# Altium PCB STM32F103RCT6最小系统.PcbDoc
Units mil, origin at the board's own origin, x right, y up, seen from the top; angles counter-clockwise.
Board outline 6000 x 4000 mil, 2 copper layers (Top Layer, Bottom Layer); 52 components, 58 nets, 352 pads, 13 vias.
Unrouted connection lines stored in the file: 58.
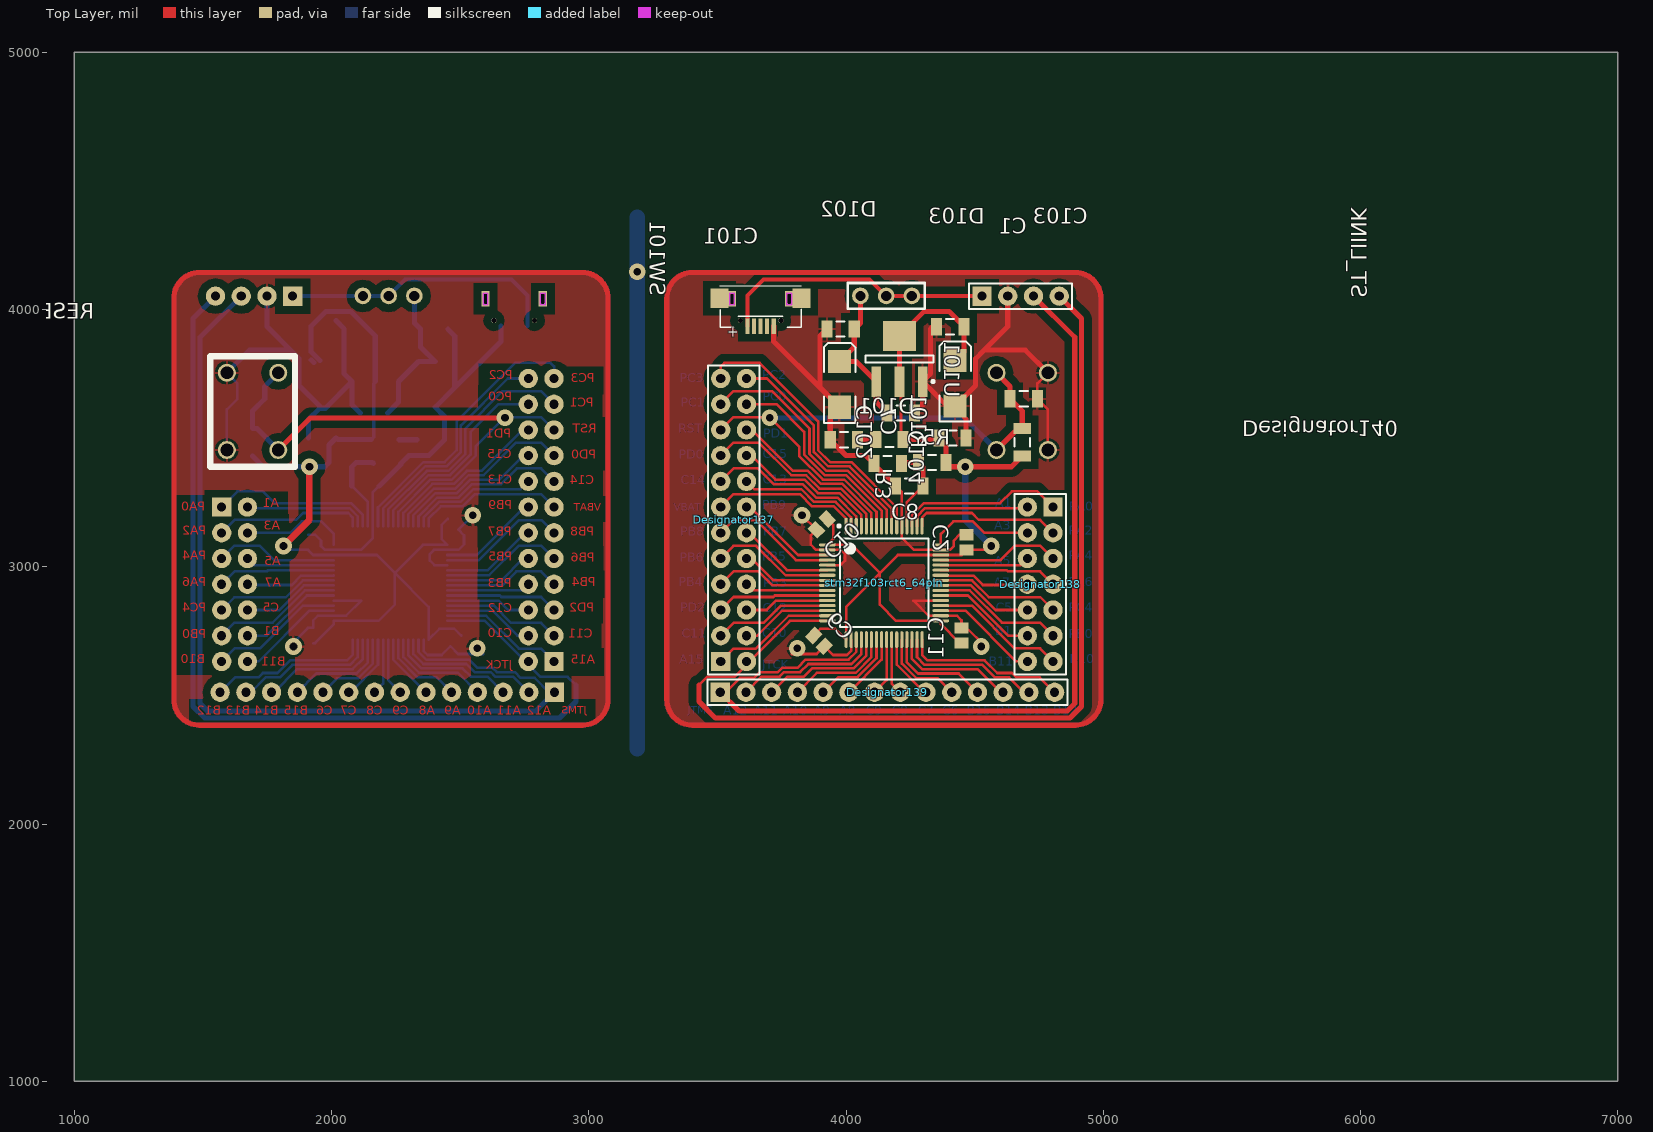
[diagram p0: Top Layer view]
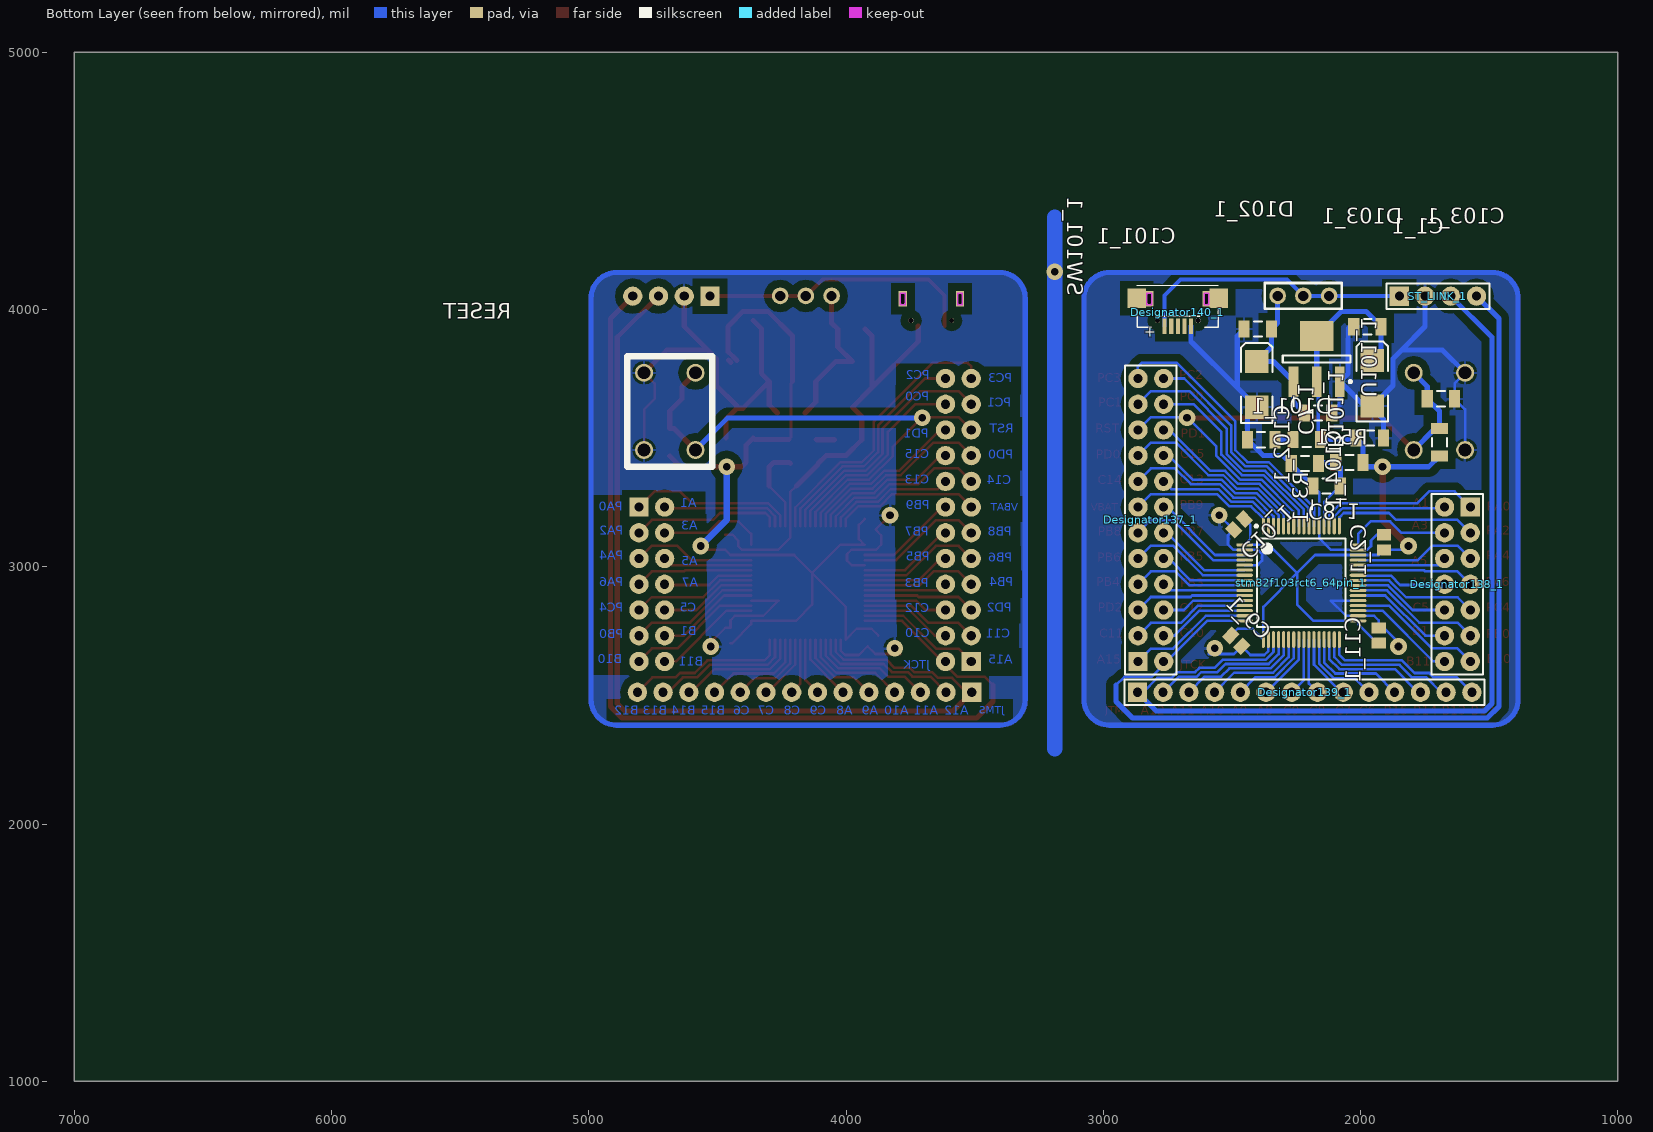
[diagram p1: Bottom Layer view, seen from below]

## Layer stack, top to bottom
Top Solder: solder mask 0.4, Solder Resist, Dk 3.5
Top Layer: signal copper 1.4
Dielectric 1: dielectric 12.6, FR-4, Dk 4.8
Bottom Layer: signal copper 1.4
Bottom Solder: solder mask 0.4, Solder Resist, Dk 3.5

## Board outline
1000,1000 7000,1000 7000,5000 1000,5000

## Design rules (kind name [scope] priority, off if disabled: settings)
Clearance Clearance_ploygon [InPolygon] p1: gap=30 ignorepadtopadclearanceinfootprint=FALSE except(0: Arc-Hole Track-Hole SMDPad-Hole THPad-Hole Via-Hole Fill-Hole Poly-Hole Region-Hole Text-Hole)
Clearance [All] p2: gap=7 ignorepadtopadclearanceinfootprint=FALSE except(0: Arc-Hole Track-Hole SMDPad-Hole THPad-Hole Via-Hole Fill-Hole Poly-Hole Region-Hole Text-Hole)
PolygonConnect [All] p1: connectstyle=Relief reliefconductorwidth=10 reliefentries=4 polygonreliefangle="90 Angle" airgapwidth=10
RoutingVias [All] p1: holewidth=28 width=50 viastyle="Through Hole" minholewidth=28 minwidth=50 maxholewidth=28 maxwidth=50
SolderMaskExpansion [All] p1: expansion=4
Width [All] p1: maxlimit=100 minlimit=10 preferedwidth=10
30 further rules are at their usual default settings.

## Components (designator, comment, footprint, x,y, rotation, side; value= is the part's Value field where it differs from the comment)
C1 "Cap Semi" C1206 4691,3653 r180 top
C1_1 "Cap Semi" C1206 1687,3653 r0 bottom (schematic designator C1)
C2 "Cap Semi" C0805 4469,3095 r270 top
C2_1 "Cap Semi" C0805 1909,3095 r270 bottom (schematic designator C2)
C7 "Cap Semi" C1206 4162,3401 r180 top
C7_1 "Cap Semi" C1206 2216,3401 r0 bottom (schematic designator C7)
C8 "Cap Semi" C1206 4246,3314 r0 top
C8_1 "Cap Semi" C1206 2132,3314 r180 bottom (schematic designator C8)
C9 "Cap Semi" C0805 3895.12,2711.88 r135 top
C9_1 "Cap Semi" C0805 2482.88,2711.88 r45 bottom (schematic designator C9)
C10 "Cap Semi" C0805 3905.88,3164.88 r45 top
C10_1 "Cap Semi" C0805 2472.12,3164.88 r135 bottom (schematic designator C10)
C11 "Cap Semi" C0805 4449,2733 r270 top
C11_1 "Cap Semi" C0805 1929,2733 r270 bottom (schematic designator C11)
C101 "电解电容" C1206 3979,3924 r180 top
C101_1 "电解电容" C1206 2399,3924 r0 bottom (schematic designator C101)
C102 "Cap Semi" C1206 4213,3598 r180 top
C102_1 "Cap Semi" C1206 2165,3598 r0 bottom (schematic designator C102)
C103 "电解电容" C1206 4405,3933 r180 top
C103_1 "电解电容" C1206 1973,3933 r0 bottom (schematic designator C103)
C104 "Cap Semi" C1206 4414,3501 r180 top
C104_1 "Cap Semi" C1206 1964,3501 r0 bottom (schematic designator C104)
D101 "LED" C1206 4169,3495 r180 top
D101_1 "LED" C1206 2209,3495 r0 bottom (schematic designator D101)
D102 "SMBJ5.0A" SMB 3975,3709 r90 top
D102_1 "SMBJ5.0A" SMB 2403,3709 r90 bottom (schematic designator D102)
D103 "SMBJ3.3A" SMB 4424,3713.42 r90 top
D103_1 "SMBJ3.3A" SMB 1954,3713.42 r90 bottom (schematic designator D103)
Designator137 "Comment" HDR2X12 3513,2632 r90 top
Designator137_1 "Comment" HDR2X12 2865,2632 r90 bottom
Designator138 "Comment" HDR2X7 4805,3232 r270 top
Designator138_1 "Comment" HDR2X7 1573,3232 r270 bottom
Designator139 "Comment" HDR1X14 3511,2512 r0 top
Designator139_1 "Comment" HDR1X14 2867,2512 r180 bottom
Designator140 "Comment" miCRo_USB 3668,4022 r0 top
Designator140_1 "Comment" miCRo_USB 2710,4022 r180 bottom
R3 "Res3" C1206 4685,3484 r270 top
R3_1 "Res3" C1206 1693,3484 r270 bottom (schematic designator R3)
R5 "Res3" C1206 4335,3405 r180 top
R5_1 "Res3" C1206 2043,3405 r0 bottom (schematic designator R5)
R101 "Res2" C1206 3992,3494 r0 top
R101_1 "Res2" C1206 2386,3494 r180 bottom (schematic designator R101)
RESET "KRY_M" SW_4c 4785,3454 r90 bottom
RESET_1 "KRY_M" SW_4c 1593,3454 r90 top (schematic designator RESET)
ST_LIINK "Header 4" HDR1X4 4529,4052 r0 top
ST_LIINK_1 "Header 4" HDR1X4 1849,4052 r180 bottom (schematic designator ST_LIINK)
stm32f103rct6_64pin "stm32f103rct6_64pin" stm32f103rct6_64pin 4148.1,2937.47 r270 top
stm32f103rct6_64pin_1 "stm32f103rct6_64pin" stm32f103rct6_64pin 2229.9,2937.47 r270 bottom (schematic designator stm32f103rct6_64pin)
SW101 "三脚开关" 三脚开关 4056,4053 r0 top
SW101_1 "三脚开关" 三脚开关 2322,4053 r180 bottom (schematic designator SW101)
U101 "AMS1117_3.3v" AMS1117_3.3V 4208.16,3804.83 r90 top
U101_1 "AMS1117_3.3v" AMS1117_3.3V 2169.84,3804.83 r90 bottom (schematic designator U101)

## Footprints (in the part's own frame and the unit in brackets; to place one, negate y for a bottom-side part, rotate by r counter-clockwise, add the part's x,y. Pads: shape width x height; smd on the part's side, far side on the other; paste and mask are expansions set on the pad)
AMS1117_3.3V [mm] "稳压"
  rect 3x0.95 smd: 1(-2.159,-2.286) 2(-2.159,0.004) 3(-2.159,2.294)
  rect 3x3.3 smd: 4(2.341,0.004)
  silkscreen extent -2.28,-3.44 0.44,3.36, body extent -1.76,-3.35 1.95,3.36, height 1.8
C0805 [mm] "Chip Capacitor, Body 2.0x1.3mm, IPC High Density"
  rect 1.1x1.4 smd: 1(-0.75,0) 2(0.75,0)
  body extent -1.1,-0.72 1.1,0.72, height 1.4
C1206 [mm] "Chip Capacitor, Body 3.2x1.6mm, IPC High Density"
  rect 1.1x1.7 smd: 1(-1.35,0) 2(1.35,0)
  silkscreen extent -0.4,-0.75 0.4,0.75, body extent -1.7,-0.9 1.7,0.9, height 1.3
HDR1X4 [mm] "Connector; Header; 4 Position"
  rect 1.905x1.905 hole 0.9: 1(0,0)
  round 1.905 hole 0.9: 2(2.54,0) 3(5.08,0) 4(7.62,0)
  silkscreen extent -1.27,-1.27 8.89,1.27
HDR1X14 [mm] "Connector; Header; 14 Position"
  rect 1.905x1.905 hole 0.9: 1(0,0)
  round 1.905 hole 0.9: 2(2.54,0) 3(5.08,0) 4(7.62,0) 5(10.16,0) 6(12.7,0) 7(15.24,0) 8(17.78,0) 9(20.32,0) 10(22.86,0) 11(25.4,0) 12(27.94,0) 13(30.48,0) 14(33.02,0)
  silkscreen extent -1.27,-1.27 34.29,1.27
HDR2X7 [mm] "Connector; Header; 7x2 Position"
  rect 1.905x1.905 hole 0.9: 1(0,0)
  round 1.905 hole 0.9: 2(0,-2.54) 3(2.54,0) 4(2.54,-2.54) 5(5.08,0) 6(5.08,-2.54) 7(7.62,0) 8(7.62,-2.54) 9(10.16,0) 10(10.16,-2.54) 11(12.7,0) 12(12.7,-2.54) 13(15.24,0) 14(15.24,-2.54)
  silkscreen extent -1.27,-3.81 16.51,1.27
HDR2X12 [mm] "Connector; Header; 12x2 Position"
  rect 1.905x1.905 hole 0.9: 1(0,0)
  round 1.905 hole 0.9: 2(0,-2.54) 3(2.54,0) 4(2.54,-2.54) 5(5.08,0) 6(5.08,-2.54) 7(7.62,0) 8(7.62,-2.54) 9(10.16,0) 10(10.16,-2.54) 11(12.7,0) 12(12.7,-2.54) 13(15.24,0) 14(15.24,-2.54) 15(17.78,0) 16(17.78,-2.54) 17(20.32,0) 18(20.32,-2.54) 19(22.86,0) 20(22.86,-2.54) 21(25.4,0) 22(25.4,-2.54) 23(27.94,0) 24(27.94,-2.54)
  silkscreen extent -1.27,-3.81 29.21,1.27
miCRo_USB [mm]
  rect 0.4x1.55 smd: 1(-1.3,-2.2) 2(-0.65,-2.2) 3(0,-2.2) 4(0.65,-2.2) 5(1.3,-2.2)
  rect 1.8x1.9 smd: 6(-4.05,0.55) 6(4.05,0.55)
  rect 0.8x1.5 hole 0.4 slot 1 at 90 deg: 6(-2.825,0.5) 6(2.825,0.5)
  round 0.5 hole 0.5 unplated: ""(-2,-1.65) ""(2,-1.65)
  Keep-Out Layer lines w0.127: -3.054,-0.075 -2.596,-0.075 -2.596,1.043 -3.054,1.043 -3.054,-0.075 ; 2.596,-0.075 3.054,-0.075 3.054,1.043 2.596,1.043 2.596,-0.075
  silkscreen extent -4.05,-2.3 4,1.8
SMB [mm] "DO-214-AA/SMB; 2 C-Bend Leads; Body 5.3 x 3.6 mm, inc. leads (LxW)"
  rect 2.3x2.3 smd: 1(-2.25,0) 2(2.25,0)
  silkscreen extent -3.8,-1.55 4.1,1.55
stm32f103rct6_64pin [mm]
  oval 1.65x0.3 smd: 1(-5.6,-3.75) 2(-5.6,-3.25) 3(-5.6,-2.75) 4(-5.6,-2.25) 5(-5.6,-1.75) 6(-5.6,-1.25) 7(-5.6,-0.75) 8(-5.6,-0.25) 9(-5.6,0.25) 10(-5.6,0.75) 11(-5.6,1.25) 12(-5.6,1.75) 13(-5.6,2.25) 14(-5.6,2.75) 15(-5.6,3.25) 16(-5.6,3.75) 33(5.6,3.75) 34(5.6,3.25) 35(5.6,2.75) 36(5.6,2.25) 37(5.6,1.75) 38(5.6,1.25) 39(5.6,0.75) 40(5.6,0.25) 41(5.6,-0.25) 42(5.6,-0.75) 43(5.6,-1.25) 44(5.6,-1.75) 45(5.6,-2.25) 46(5.6,-2.75) 47(5.6,-3.25) 48(5.6,-3.75)
  oval 0.3x1.65 smd: 17(-3.75,5.6) 18(-3.25,5.6) 19(-2.75,5.6) 20(-2.25,5.6) 21(-1.75,5.6) 22(-1.25,5.6) 23(-0.75,5.6) 24(-0.25,5.6) 25(0.25,5.6) 26(0.75,5.6) 27(1.25,5.6) 28(1.75,5.6) 29(2.25,5.6) 30(2.75,5.6) 31(3.25,5.6) 32(3.75,5.6) 49(3.75,-5.6) 50(3.25,-5.6) 51(2.75,-5.6) 52(2.25,-5.6) 53(1.75,-5.6) 54(1.25,-5.6) 55(0.75,-5.6) 56(0.25,-5.6) 57(-0.25,-5.6) 58(-0.75,-5.6) 59(-1.25,-5.6) 60(-1.75,-5.6) 61(-2.25,-5.6) 62(-2.75,-5.6) 63(-3.25,-5.6) 64(-3.75,-5.6)
  silkscreen extent -5.72,-4.57 4.38,4.38, body extent -5,-5 5,5, height 1.6
SW_4c [mil]
  round 70 hole 50: 1(0,0) 1(300,0) 2(0,-200) 2(300,-200)
  silkscreen extent -65,-265 365,65
三脚开关 [mil]
  round 65 hole 40: 1(0,0) 2(200,0) 3(100,0)
  silkscreen extent -50,-50 250,50

## Part data
C1 C1_1 C2 C2_1 C7 C7_1 C8 C8_1 C9 C9_1 C10 C10_1 C11 C11_1 C102 C102_1 C104 C104_1: "Capacitor (Semiconductor SIM Model)"
D101 D101_1: library part LED_, "发光二极管"
D102 D102_1 D103 D103_1: library part "D Schottky", "Schottky Diode"
R3 R3_1 R5 R5_1 R101 R101_1: "Resistor"
RESET RESET_1: library part SW_4t
ST_LIINK ST_LIINK_1: "Header, 4-Pin"

## Via types
v1: diameter 65, hole 30, Top Layer to Bottom Layer, 13 vias

## Nets (pads, with @x,y where several pads share a name; then routed paths per layer and width w, separated by ;. In a path a pad name is that pad's centre, name@x,y a point inside that pad or via, vN(x,y) a via of type N, cw(c..) or ccw(c..) an arc to the next point about the centre after c; other vN are vias at no path point)
GND: C1.1 C1_1.1 C2.1 C2_1.1 C7.2 C7_1.2 C8.1 C8_1.1 C9.1 C9_1.1 C10.1 C10_1.1 C11.1 C11_1.1 C101.2 C101_1.2 C102.1 C102_1.1 C103.2 C103_1.2 C104.1 C104_1.1 D102.1 D102_1.1 D103.1 D103_1.1 Designator140.5 Designator140_1.5 R101.1 R101_1.1 RESET.1 RESET_1.1 ST_LIINK.2 ST_LIINK_1.2 stm32f103rct6_64pin.12 stm32f103rct6_64pin.18 stm32f103rct6_64pin.28 stm32f103rct6_64pin.31 stm32f103rct6_64pin.47 stm32f103rct6_64pin.60 stm32f103rct6_64pin.63 stm32f103rct6_64pin_1.12 stm32f103rct6_64pin_1.18 stm32f103rct6_64pin_1.28 stm32f103rct6_64pin_1.31 stm32f103rct6_64pin_1.47 stm32f103rct6_64pin_1.60 stm32f103rct6_64pin_1.63 U101.1 U101_1.1 | length 36276.8
  Top Layer w10: v1@3789,2661 3886,2661 C9.1 3950,2657 4003.96,2657 4020.15,2673.19 stm32f103rct6_64pin.47 ; v1@3801,3200 v1(3829,3200) C10.1 3863,3122 3863,3086.43 3884,3065.43 stm32f103rct6_64pin.63 3979.57,3065.43 3996,3049 3996,3024 3978.37,3006.37 stm32f103rct6_64pin.60 ; C8.1 4217,3289.85 stm32f103rct6_64pin.12 4217,3112 4263.57,3065.43 stm32f103rct6_64pin.18 4403.87,3065.43 4419,3080.56 4419,3101.78 4441.75,3124.53 C2.1 ; stm32f103rct6_64pin.28 4261.85,2868.57 4320.91,2809.52 stm32f103rct6_64pin.31 4431.48,2809.52 4449,2792 C11.1 4469.47,2762.53 v1@4538,2694 ; RESET.1@4785,3454 4785,3612.15 C1.1 4744.15,3713.15 RESET.1@4785,3754
  Top Layer w20: 1992,2384 2975,2384 ccw(c2975,2484) 3075,2484 3075,4044 ccw(c2975,4044) 2975,4144 1487,4144 ccw(c1487,4044) 1387,4044 1387,2484 ccw(c1487,2484) 1487,2384 1994,2384 ; Designator140.5 3719.18,3876.24 3899,3696.42 ; 3908,2384 4891,2384 ccw(c4891,2484) 4991,2484 4991,4044 ccw(c4891,4044) 4891,4144 3403,4144 ccw(c3403,4044) 3303,4044 3303,2484 ccw(c3403,2484) 3403,2384 3910,2384 ; C101.2 3899,3897.15 3899,3696.42 ; C8.1 4108.85,3398 C7.2 4076.85,3433 3999.85,3433 R101.1 3938.85,3584.27 D102.1 3899,3696.42 ; C102.1 4298.16,3630.01 U101.1 ; C103.2@4360.93,3956.93 4329,3925 4329,3750.68 U101.1 ; D103.1 4504,3704.83 4504,3809 4537,3842 ; C104.1 4467.15,3573.27 4424,3616.42 4401.57,3616.42 U101.1 ; ST_LIINK.2 4629,3934 4537,3842 ; RESET.1@4785,3754 4697,3842 4537,3842
  Bottom Layer w10: RESET_1.1@1593,3454 1593,3612.15 C1_1.1 1633.85,3713.15 RESET_1.1@1593,3754 ; v1@1840,2694 1908.53,2762.53 C11_1.1 1929,2792 1946.52,2809.52 stm32f103rct6_64pin_1.31 2057.09,2809.52 2116.15,2868.57 stm32f103rct6_64pin_1.28 ; C2_1.1 1936.25,3124.53 1959,3101.78 1959,3080.56 1974.13,3065.43 stm32f103rct6_64pin_1.18 2114.43,3065.43 2161,3112 stm32f103rct6_64pin_1.12 2161,3289.85 C8_1.1 ; stm32f103rct6_64pin_1.47 2357.85,2673.19 2374.04,2657 2428,2657 C9_1.1 2492,2661 v1@2589,2661 ; stm32f103rct6_64pin_1.60 2399.63,3006.37 2382,3024 2382,3049 2398.43,3065.43 stm32f103rct6_64pin_1.63 2494,3065.43 2515,3086.43 2515,3122 C10_1.1 v1(2549,3200) v1@2577,3200
  Bottom Layer w20: RESET_1.1@1593,3754 1681,3842 1841,3842 ; ST_LIINK_1.2 1749,3934 1841,3842 ; C104_1.1 1910.85,3573.27 1954,3616.42 1976.43,3616.42 U101_1.1 ; D103_1.1 1874,3704.83 1874,3809 1841,3842 ; C103_1.2@2017.07,3956.93 2049,3925 2049,3750.68 U101_1.1 ; C102_1.1 2079.84,3630.01 U101_1.1 ; C8_1.1 2269.15,3398 C7_1.2 2301.15,3433 2378.15,3433 R101_1.1 2439.15,3584.27 D102_1.1 2479,3696.42 ; C101_1.2 2479,3897.15 2479,3696.42 ; 2468,2384 2975,2384 ccw(c2975,2484) 3075,2484 3075,4044 ccw(c2975,4044) 2975,4144 1487,4144 ccw(c1487,4044) 1387,4044 1387,2484 ccw(c1487,2484) 1487,2384 2470,2384 ; Designator140_1.5 2658.82,3876.24 2479,3696.42 ; 4384,2384 4891,2384 ccw(c4891,2484) 4991,2484 4991,4044 ccw(c4891,4044) 4891,4144 3403,4144 ccw(c3403,4044) 3303,4044 3303,2484 ccw(c3403,2484) 3403,2384 4386,2384
  other v1: 2567,2683 3811,2683 1852,2690 4526,2690
JTCK: Designator137.2 Designator137_1.2 ST_LIINK.4 ST_LIINK_1.4 stm32f103rct6_64pin.49 stm32f103rct6_64pin_1.49 | length 7678
  Top Layer w10: 3428,2540 3460,2572 3566,2572 3613,2619 Designator137.2 3624,2632 3781.83,2789.83 stm32f103rct6_64pin.49
  Top Layer w20: 3428,2540 3428,2476 3492,2412 4871.18,2412 4916,2456.82 4916,3965 ST_LIINK.4
  Bottom Layer w10: stm32f103rct6_64pin_1.49 2596.17,2789.83 2754,2632 Designator137_1.2 2765,2619 2812,2572 2918,2572 2950,2540
  Bottom Layer w20: ST_LIINK_1.4 1462,3965 1462,2456.82 1506.82,2412 2886,2412 2950,2476 2950,2540
JTDI: Designator137.1 Designator137_1.1 stm32f103rct6_64pin.50 stm32f103rct6_64pin_1.50 | length 976.3
  Top Layer w10: Designator137.1 3563,2682 3649.96,2682 3777.48,2809.52 stm32f103rct6_64pin.50
  Bottom Layer w10: stm32f103rct6_64pin_1.50 2600.52,2809.52 2728.04,2682 2815,2682 Designator137_1.1
JTDO: Designator137.8 Designator137_1.8 stm32f103rct6_64pin.55 stm32f103rct6_64pin_1.55 | length 649.2
  Top Layer w10: Designator137.8 3637.06,2907.94 stm32f103rct6_64pin.55
  Bottom Layer w10: stm32f103rct6_64pin_1.55 2740.94,2907.94 Designator137_1.8
JTMS: Designator139.1 Designator139_1.1 ST_LIINK.3 ST_LIINK_1.3 stm32f103rct6_64pin.46 stm32f103rct6_64pin_1.46 | length 7425
  Top Layer w10: Designator139.1 3532,2512 3588,2568 3642.96,2568 3664.96,2590 3734.96,2590 3751.96,2607 3811,2607 3843,2639 4010,2639 4039.83,2668.83 stm32f103rct6_64pin.46
  Top Layer w20: Designator139.1 3584,2439 4860,2439 4889,2468 4889,3892 ST_LIINK.3
  Bottom Layer w10: stm32f103rct6_64pin_1.46 2338.17,2668.83 2368,2639 2535,2639 2567,2607 2626.04,2607 2643.04,2590 2713.04,2590 2735.04,2568 2790,2568 2846,2512 Designator139_1.1
  Bottom Layer w20: ST_LIINK_1.3 1489,3892 1489,2468 1518,2439 2794,2439 Designator139_1.1
JTRST: Designator137.7 Designator137_1.7 stm32f103rct6_64pin.56 stm32f103rct6_64pin_1.56 | length 915.7
  Top Layer w10: Designator137.7 3563,2982 3659,2982 3713.37,2927.63 stm32f103rct6_64pin.56
  Bottom Layer w10: stm32f103rct6_64pin_1.56 2664.63,2927.63 2719,2982 2815,2982 Designator137_1.7
NetC7_1: C7.1 C7_1.1 C8.2 C8_1.2 R5.2 R5_1.2 stm32f103rct6_64pin.13 stm32f103rct6_64pin_1.13 | length 696.9
  Top Layer w10: stm32f103rct6_64pin.13 4236.69,3251.54 C8.2
  Top Layer w20: C7.1 4219.15,3405 R5.2 4299.15,3387.7 C8.2
  Bottom Layer w10: C8_1.2 2141.32,3251.54 stm32f103rct6_64pin_1.13
  Bottom Layer w20: C8_1.2 2078.85,3387.7 R5_1.2 2158.85,3405 C7_1.1
NetD101_2: D101.2 D101_1.2 R101.2 R101_1.2 | length 142.2
  Top Layer w20: R101.2 4114.85,3494 D101.2
  Bottom Layer w20: D101_1.2 2263.15,3494 R101_1.2
OSC32: Designator137.15 Designator137_1.15 stm32f103rct6_64pin.3 stm32f103rct6_64pin_1.3 | length 1326.4
  Top Layer w10: Designator137.15 3563.5,3382.5 3657.5,3382.5 3719,3321 3831.67,3321 3883.67,3269 3967.04,3269 4039.83,3196.21 stm32f103rct6_64pin.3
  Bottom Layer w10: stm32f103rct6_64pin_1.3 2338.17,3196.21 2410.96,3269 2494.33,3269 2546.33,3321 2659,3321 2720.5,3382.5 2814.5,3382.5 Designator137_1.15
OSC33: Designator137.18 Designator137_1.18 stm32f103rct6_64pin.4 stm32f103rct6_64pin_1.4 | length 1170
  Top Layer w10: Designator137.18 3632.04,3432 3725.33,3338.71 3838,3338.71 3890.71,3286 3974.08,3286 4059.52,3200.56 stm32f103rct6_64pin.4
  Bottom Layer w10: stm32f103rct6_64pin_1.4 2318.48,3200.56 2403.92,3286 2487.29,3286 2540,3338.71 2652.67,3338.71 2745.96,3432 Designator137_1.18
"OSC IN": Designator137.17 Designator137_1.17 stm32f103rct6_64pin.5 stm32f103rct6_64pin_1.5 | length 1498.2
  Top Layer w10: Designator137.17 3563.5,3482.5 3660.5,3482.5 3787.29,3355.71 3845.04,3355.71 3896.75,3304 3980.12,3304 4079.2,3204.92 stm32f103rct6_64pin.5
  Bottom Layer w10: stm32f103rct6_64pin_1.5 2298.8,3204.92 2397.88,3304 2481.25,3304 2532.96,3355.71 2590.71,3355.71 2717.5,3482.5 2814.5,3482.5 Designator137_1.17
"OSC OUT": Designator137.20 Designator137_1.20 stm32f103rct6_64pin.6 stm32f103rct6_64pin_1.6 | length 1341.9
  Top Layer w10: Designator137.20 3635.04,3532 3794.33,3372.71 3851.92,3372.71 3852,3372.79 3902.79,3322 3986.17,3322 4098.89,3209.28 stm32f103rct6_64pin.6
  Bottom Layer w10: stm32f103rct6_64pin_1.6 2279.11,3209.28 2391.83,3322 2475.21,3322 2526,3372.79 2526.08,3372.71 2583.67,3372.71 2742.96,3532 Designator137_1.20
PA0: Designator138.1 Designator138_1.1 stm32f103rct6_64pin.14 stm32f103rct6_64pin_1.14 | length 1309.5
  Top Layer w10: stm32f103rct6_64pin.14 4256.37,3200.45 4302.92,3247 4599,3247 4645,3293 4744,3293 Designator138.1
  Bottom Layer w10: Designator138_1.1 1634,3293 1733,3293 1779,3247 2075.08,3247 2121.63,3200.45 stm32f103rct6_64pin_1.14
PA1: Designator138.2 Designator138_1.2 stm32f103rct6_64pin.15 stm32f103rct6_64pin_1.15 | length 960.6
  Top Layer w10: stm32f103rct6_64pin.15 4276.06,3196.1 4307.96,3228 Designator138.2@4705,3228
  Bottom Layer w10: Designator138_1.2@1673,3228 2070.04,3228 2101.94,3196.1 stm32f103rct6_64pin_1.15
PA2: Designator138.3 Designator138_1.3 stm32f103rct6_64pin.16 stm32f103rct6_64pin_1.16 | length 1164.2
  Top Layer w10: stm32f103rct6_64pin.16 4295.74,3191.74 4313,3209 4489,3209 4516,3182 4755,3182 Designator138.3
  Bottom Layer w10: Designator138_1.3 1623,3182 1862,3182 1889,3209 2065,3209 2082.26,3191.74 stm32f103rct6_64pin_1.16
PA3: Designator138.4 Designator138_1.4 stm32f103rct6_64pin.17 stm32f103rct6_64pin_1.17 | length 835.8
  Top Layer w10: stm32f103rct6_64pin.17 4368.57,3128 4417.15,3176.57 4493.43,3176.57 4538,3132 Designator138.4
  Bottom Layer w10: Designator138_1.4 1840,3132 1884.57,3176.57 1960.85,3176.57 2009.43,3128 stm32f103rct6_64pin_1.17
PA4: Designator138.5 Designator138_1.5 stm32f103rct6_64pin.20 stm32f103rct6_64pin_1.20 | length 961.4
  Top Layer w10: stm32f103rct6_64pin.20 4601.06,3026.06 4657.5,3082.5 4754.5,3082.5 Designator138.5
  Bottom Layer w10: Designator138_1.5 1623.5,3082.5 1720.5,3082.5 1776.94,3026.06 stm32f103rct6_64pin_1.20
PA5: Designator138.6 Designator138_1.6 stm32f103rct6_64pin.21 stm32f103rct6_64pin_1.21 | length 694.1
  Top Layer w10: stm32f103rct6_64pin.21 4679.37,3006.37 Designator138.6
  Bottom Layer w10: Designator138_1.6 1698.63,3006.37 stm32f103rct6_64pin_1.21
PA6: Designator138.7 Designator138_1.7 stm32f103rct6_64pin.22 stm32f103rct6_64pin_1.22 | length 918.2
  Top Layer w10: stm32f103rct6_64pin.22 4624.31,2986.69 4629,2982 4755,2982 Designator138.7
  Bottom Layer w10: Designator138_1.7 1623,2982 1749,2982 1753.69,2986.69 stm32f103rct6_64pin_1.22
PA7: Designator138.8 Designator138_1.8 stm32f103rct6_64pin.23 stm32f103rct6_64pin_1.23 | length 706.8
  Top Layer w10: stm32f103rct6_64pin.23 4370.35,2965.22 4495.9,2965.22 4532.12,2929 4702,2929 Designator138.8
  Bottom Layer w10: Designator138_1.8 1676,2929 1845.88,2929 1882.1,2965.22 2007.65,2965.22 stm32f103rct6_64pin_1.23
PA8: Designator139.6 Designator139_1.6 stm32f103rct6_64pin.41 stm32f103rct6_64pin_1.41 | length 552.2
  Top Layer w10: Designator139.6@3990,2507 Designator139.6@4003,2520 ; Designator139.6 4138.26,2639.26 stm32f103rct6_64pin.41
  Bottom Layer w10: stm32f103rct6_64pin_1.41 2239.74,2639.26 Designator139_1.6 ; Designator139_1.6@2375,2520 Designator139_1.6@2388,2507
PA9: Designator139.5 Designator139_1.5 stm32f103rct6_64pin.42 stm32f103rct6_64pin_1.42 | length 706.6
  Top Layer w10: Designator139.5@3890,2507 Designator139.5@3903,2520 ; Designator139.5 3970,2571 4045.04,2571 4118.57,2644.53 stm32f103rct6_64pin.42
  Bottom Layer w10: stm32f103rct6_64pin_1.42 2259.43,2644.53 2332.96,2571 2408,2571 Designator139_1.5 ; Designator139_1.5@2475,2520 Designator139_1.5@2488,2507
PA10: Designator139.4 Designator139_1.4 stm32f103rct6_64pin.43 stm32f103rct6_64pin_1.43 | length 825.4
  Top Layer w10: Designator139.4 3887,2588 4038,2588 4098.89,2648.89 stm32f103rct6_64pin.43
  Bottom Layer w10: stm32f103rct6_64pin_1.43 2279.11,2648.89 2340,2588 2491,2588 Designator139_1.4
PA11: Designator139.3 Designator139_1.3 stm32f103rct6_64pin.44 stm32f103rct6_64pin_1.44 | length 978.6
  Top Layer w10: Designator139.3 3772,2573 3836,2573 3868,2605 4029,2605 4079.2,2655.2 stm32f103rct6_64pin.44
  Bottom Layer w10: stm32f103rct6_64pin_1.44 2298.8,2655.2 2349,2605 2510,2605 2542,2573 2606,2573 Designator139_1.3
PA12: Designator139.2 Designator139_1.2 stm32f103rct6_64pin.45 stm32f103rct6_64pin_1.45 | length 1180.9
  Top Layer w10: Designator139.2@3590,2507 3609,2507 Designator139.2@3612.5,2510.5 ; Designator139.2 3672,2573 3742,2573 3759,2590 3822,2590 3854,2622 4021,2622 4059.52,2660.52 stm32f103rct6_64pin.45
  Bottom Layer w10: stm32f103rct6_64pin_1.45 2318.48,2660.52 2357,2622 2524,2622 2556,2590 2619,2590 2636,2573 2706,2573 Designator139_1.2 ; Designator139_1.2@2765.5,2510.5 2769,2507 Designator139_1.2@2788,2507
PB0: Designator138.11 Designator138_1.11 stm32f103rct6_64pin.26 stm32f103rct6_64pin_1.26 | length 1018.6
  Top Layer w10: stm32f103rct6_64pin.26 4481.06,2907.94 4606.5,2782.5 4754.5,2782.5 Designator138.11
  Bottom Layer w10: Designator138_1.11 1623.5,2782.5 1771.5,2782.5 1896.94,2907.94 stm32f103rct6_64pin_1.26
PB1: Designator138.12 Designator138_1.12 stm32f103rct6_64pin.27 stm32f103rct6_64pin_1.27 | length 802.3
  Top Layer w10: stm32f103rct6_64pin.27 4473.78,2888.26 4630.04,2732 Designator138.12
  Bottom Layer w10: Designator138_1.12 1747.96,2732 1904.22,2888.26 stm32f103rct6_64pin_1.27
PB5: Designator137.10 Designator137_1.10 stm32f103rct6_64pin.57 stm32f103rct6_64pin_1.57 | length 699.4
  Top Layer w10: Designator137.10 3633.04,3032 3717.73,2947.32 stm32f103rct6_64pin.57
  Bottom Layer w10: stm32f103rct6_64pin_1.57 2660.27,2947.32 2744.96,3032 Designator137_1.10
PB6: Designator137.9 Designator137_1.9 stm32f103rct6_64pin.58 stm32f103rct6_64pin_1.58 | length 965.1
  Top Layer w10: Designator137.9 3562.5,3081.5 3650.5,3081.5 3765,2967 stm32f103rct6_64pin.58
  Bottom Layer w10: stm32f103rct6_64pin_1.58 2613,2967 2727.5,3081.5 2815.5,3081.5 Designator137_1.9
PB7: Designator137.12 Designator137_1.12 stm32f103rct6_64pin.59 stm32f103rct6_64pin_1.59 | length 749.6
  Top Layer w10: Designator137.12 3625,3132 3770.31,2986.69 stm32f103rct6_64pin.59
  Bottom Layer w10: stm32f103rct6_64pin_1.59 2607.69,2986.69 2753,3132 Designator137_1.12
PB8: Designator137.11 Designator137_1.11 stm32f103rct6_64pin.61 stm32f103rct6_64pin_1.61 | length 999
  Top Layer w10: Designator137.11 3562.5,3181.5 3649.5,3181.5 3804.94,3026.06 stm32f103rct6_64pin.61
  Bottom Layer w10: stm32f103rct6_64pin_1.61 2573.06,3026.06 2728.5,3181.5 2815.5,3181.5 Designator137_1.11
PB9: Designator137.14 Designator137_1.14 stm32f103rct6_64pin.62 stm32f103rct6_64pin_1.62 | length 783.6
  Top Layer w10: Designator137.14 3627,3232 3813.26,3045.74 stm32f103rct6_64pin.62
  Bottom Layer w10: stm32f103rct6_64pin_1.62 2564.74,3045.74 2751,3232 Designator137_1.14
PB10: Designator138.13 Designator138_1.13 stm32f103rct6_64pin.29 stm32f103rct6_64pin_1.29 | length 1052.5
  Top Layer w10: stm32f103rct6_64pin.29 4489.11,2848.89 4655.5,2682.5 4754.5,2682.5 Designator138.13
  Bottom Layer w10: Designator138_1.13 1623.5,2682.5 1722.5,2682.5 1888.89,2848.89 stm32f103rct6_64pin_1.29
PB11: Designator138.14 Designator138_1.14 stm32f103rct6_64pin.30 stm32f103rct6_64pin_1.30 | length 836.2
  Top Layer w10: stm32f103rct6_64pin.30 4463.8,2829.2 4661,2632 Designator138.14
  Bottom Layer w10: Designator138_1.14 1717,2632 1914.2,2829.2 stm32f103rct6_64pin_1.30
PB12: Designator139.14 Designator139_1.14 stm32f103rct6_64pin.33 stm32f103rct6_64pin_1.33 | length 1270.3
  Top Layer w10: stm32f103rct6_64pin.33 4295.74,2657.26 4317,2636 4539,2636 4588,2587 4645,2587 4662,2570 4753,2570 Designator139.14
  Bottom Layer w10: Designator139_1.14 1625,2570 1716,2570 1733,2587 1790,2587 1839,2636 2061,2636 2082.26,2657.26 stm32f103rct6_64pin_1.33
PB13: Designator139.13 Designator139_1.13 stm32f103rct6_64pin.34 stm32f103rct6_64pin_1.34 | length 1119.4
  Top Layer w10: stm32f103rct6_64pin.34 4276.06,2648.94 4306,2619 4530,2619 4579,2570 4634,2570 4692,2512 Designator139.13
  Bottom Layer w10: Designator139_1.13 1686,2512 1744,2570 1799,2570 1848,2619 2072,2619 2101.94,2648.94 stm32f103rct6_64pin_1.34
PB14: Designator139.12 Designator139_1.12 stm32f103rct6_64pin.35 stm32f103rct6_64pin_1.35 | length 967.4
  Top Layer w10: stm32f103rct6_64pin.35 4256.37,2641.59 4295.96,2602 4512,2602 4602,2512 Designator139.12
  Bottom Layer w10: Designator139_1.12 1776,2512 1866,2602 2082.04,2602 2121.63,2641.59 stm32f103rct6_64pin_1.35
PB15: Designator139.11 Designator139_1.11 stm32f103rct6_64pin.36 stm32f103rct6_64pin_1.36 | length 822.3
  Top Layer w10: stm32f103rct6_64pin.36 4236.69,2628.36 4280.04,2585 4438,2585 Designator139.11
  Bottom Layer w10: Designator139_1.11 1940,2585 2097.96,2585 2141.32,2628.36 stm32f103rct6_64pin_1.36
PC0: Designator137.22 Designator137_1.22 stm32f103rct6_64pin.8 stm32f103rct6_64pin_1.8 | length 1616.8
  Top Layer w10: Designator137.22 3729,3632 3837,3524 3837,3435.88 3916.88,3356 4000.25,3356 4138.26,3217.99 stm32f103rct6_64pin.8
  Bottom Layer w10: stm32f103rct6_64pin_1.8 2239.74,3217.99 2377.75,3356 2461.12,3356 2541,3435.88 2541,3524 2649,3632 Designator137_1.22
PC1: Designator137.21 Designator137_1.21 stm32f103rct6_64pin.9 stm32f103rct6_64pin_1.9 | length 1956.6
  Top Layer w10: Designator137.21 3563.5,3682.5 3712.5,3682.5 3858,3537 3858,3438.92 3923.92,3373 4007.29,3373 4157.94,3222.35 stm32f103rct6_64pin.9
  Bottom Layer w10: stm32f103rct6_64pin_1.9 2220.06,3222.35 2370.71,3373 2454.08,3373 2520,3438.92 2520,3537 2665.5,3682.5 2814.5,3682.5 Designator137_1.21
PC2: Designator137.24 Designator137_1.24 stm32f103rct6_64pin.10 stm32f103rct6_64pin_1.10 | length 1807.3
  Top Layer w10: Designator137.24 3693,3732 3875,3550 3875,3445.96 3930.96,3390 4014.33,3390 4177.63,3226.7 stm32f103rct6_64pin.10
  Bottom Layer w10: stm32f103rct6_64pin_1.10 2200.37,3226.7 2363.67,3390 2447.04,3390 2503,3445.96 2503,3550 2685,3732 Designator137_1.24
PC3: Designator137.23 Designator137_1.23 stm32f103rct6_64pin.11 stm32f103rct6_64pin_1.11 | length 2217.2
  Top Layer w10: Designator137.23 3513,3779 3527,3793 3664,3793 3892,3565 3892,3453 3938,3407 4021.37,3407 4197.31,3231.06 stm32f103rct6_64pin.11
  Bottom Layer w10: stm32f103rct6_64pin_1.11 2180.69,3231.06 2356.63,3407 2440,3407 2486,3453 2486,3565 2714,3793 2851,3793 2865,3779 Designator137_1.23
PC4: Designator138.9 Designator138_1.9 stm32f103rct6_64pin.24 stm32f103rct6_64pin_1.24 | length 968.4
  Top Layer w10: stm32f103rct6_64pin.24 4489.77,2947.32 4555.58,2881.5 4755.5,2881.5 Designator138.9
  Bottom Layer w10: Designator138_1.9 1622.5,2881.5 1822.42,2881.5 1888.23,2947.32 stm32f103rct6_64pin_1.24
PC5: Designator138.10 Designator138_1.10 stm32f103rct6_64pin.25 stm32f103rct6_64pin_1.25 | length 752.1
  Top Layer w10: stm32f103rct6_64pin.25 4485.41,2927.63 4581.04,2832 Designator138.10
  Bottom Layer w10: Designator138_1.10 1796.96,2832 1892.59,2927.63 stm32f103rct6_64pin_1.25
PC6: Designator139.10 Designator139_1.10 stm32f103rct6_64pin.37 stm32f103rct6_64pin_1.37 | length 666.8
  Top Layer w10: stm32f103rct6_64pin.37 4217,2624 4275,2566 4357,2566 Designator139.10
  Bottom Layer w10: Designator139_1.10 2021,2566 2103,2566 2161,2624 stm32f103rct6_64pin_1.37
PC7: Designator139.9 Designator139_1.9 stm32f103rct6_64pin.38 stm32f103rct6_64pin_1.38 | length 521.3
  Top Layer w10: stm32f103rct6_64pin.38 4197.31,2619.64 4304.96,2512 Designator139.9 ; Designator139.9@4290,2507 Designator139.9@4290,2512
  Bottom Layer w10: Designator139_1.9 2073.04,2512 2180.69,2619.64 stm32f103rct6_64pin_1.38 ; Designator139_1.9@2088,2507 Designator139_1.9@2088,2512
PC8: Designator139.8 Designator139_1.8 stm32f103rct6_64pin.39 stm32f103rct6_64pin_1.39 | length 437.6
  Top Layer w10: stm32f103rct6_64pin.39 4177.63,2545.37 Designator139.8
  Bottom Layer w10: Designator139_1.8 2200.37,2545.37 stm32f103rct6_64pin_1.39
PC9: Designator139.7 Designator139_1.7 stm32f103rct6_64pin.40 stm32f103rct6_64pin_1.40 | length 485.7
  Top Layer w10: Designator139.7@4090,2507 Designator139.7@4103,2520 ; Designator139.7 4157.94,2558.94 stm32f103rct6_64pin.40
  Bottom Layer w10: stm32f103rct6_64pin_1.40 2220.06,2558.94 Designator139_1.7 ; Designator139_1.7@2275,2520 Designator139_1.7@2288,2507
PC10: Designator137.4 Designator137_1.4 stm32f103rct6_64pin.51 stm32f103rct6_64pin_1.51 | length 709.8
  Top Layer w10: Designator137.4 3655,2732 3752.2,2829.2 stm32f103rct6_64pin.51
  Bottom Layer w10: stm32f103rct6_64pin_1.51 2625.8,2829.2 2723,2732 Designator137_1.4
PC11: Designator137.3 Designator137_1.3 stm32f103rct6_64pin.52 stm32f103rct6_64pin_1.52 | length 926.1
  Top Layer w10: Designator137.3 3563,2782 3680,2782 3746.89,2848.89 stm32f103rct6_64pin.52
  Bottom Layer w10: stm32f103rct6_64pin_1.52 2631.11,2848.89 2698,2782 2815,2782 Designator137_1.3
PC12: Designator137.6 Designator137_1.6 stm32f103rct6_64pin.53 stm32f103rct6_64pin_1.53 | length 659.6
  Top Layer w10: Designator137.6 3691.43,2832 3728,2868.57 stm32f103rct6_64pin.53
  Bottom Layer w10: stm32f103rct6_64pin_1.53 2650,2868.57 2686.57,2832 Designator137_1.6
PC13: Designator137.16 Designator137_1.16 stm32f103rct6_64pin.2 stm32f103rct6_64pin_1.2 | length 998.2
  Top Layer w10: Designator137.16 3643,3302 3826,3302 3876,3252 3960,3252 4020.15,3191.85 stm32f103rct6_64pin.2
  Bottom Layer w10: stm32f103rct6_64pin_1.2 2357.85,3191.85 2418,3252 2502,3252 2552,3302 2735,3302 Designator137_1.16
PD2: Designator137.5 Designator137_1.5 stm32f103rct6_64pin.54 stm32f103rct6_64pin_1.54 | length 875.9
  Top Layer w10: Designator137.5 3563.5,2882.5 3717.88,2882.5 3723.64,2888.26 stm32f103rct6_64pin.54
  Bottom Layer w10: stm32f103rct6_64pin_1.54 2654.36,2888.26 2660.12,2882.5 2814.5,2882.5 Designator137_1.5
RESET: C1.2 C1_1.2 Designator137.19 Designator137_1.19 R3.1 R3_1.1 RESET.2 RESET_1.2 stm32f103rct6_64pin.7 stm32f103rct6_64pin_1.7 | length 4362.5
  Top Layer w10: Designator137.19 3563,3582 3703,3582 3818,3467 3818,3430.83 3909.83,3339 3993.21,3339 4118.57,3213.63 stm32f103rct6_64pin.7
  Top Layer w20: RESET_1.2@1793,3454 1918,3579 v1(2674,3579) ; RESET.2@4585,3454 4668.15,3537.15 R3.1 4685,3605.85 C1.2 4637.85,3701.15 RESET.2@4585,3754
  Bottom Layer w10: stm32f103rct6_64pin_1.7 2259.43,3213.63 2384.79,3339 2468.17,3339 2560,3430.83 2560,3467 2675,3582 2815,3582 Designator137_1.19
  Bottom Layer w20: RESET_1.2@1793,3454 1709.85,3537.15 R3_1.1 1693,3605.85 C1_1.2 1740.15,3701.15 RESET_1.2@1793,3754 ; v1(3704,3579) 4460,3579 RESET.2@4585,3454
VBAT: Designator137.13 Designator137_1.13 stm32f103rct6_64pin.1 stm32f103rct6_64pin_1.1 | length 1154.5
  Top Layer w10: Designator137.13 3563.5,3282.5 3820.5,3282.5 3868,3235 3952.92,3235 4000.46,3187.45 stm32f103rct6_64pin.1
  Bottom Layer w10: stm32f103rct6_64pin_1.1 2377.54,3187.45 2425.08,3235 2510,3235 2557.5,3282.5 2814.5,3282.5 Designator137_1.13
VCC3.3: C2.2 C2_1.2 C9.2 C9_1.2 C10.2 C10_1.2 C11.2 C11_1.2 C103.1 C103_1.1 C104.2 C104_1.2 D101.1 D101_1.1 D103.2 D103_1.2 R3.2 R3_1.2 R5.1 R5_1.1 stm32f103rct6_64pin.19 stm32f103rct6_64pin.32 stm32f103rct6_64pin.48 stm32f103rct6_64pin.64 stm32f103rct6_64pin_1.19 stm32f103rct6_64pin_1.32 stm32f103rct6_64pin_1.48 stm32f103rct6_64pin_1.64 U101.2 U101.4 U101_1.2 U101_1.4 | length 7244.3
  Top Layer w10: C9.2 3900.48,2759 3958.46,2759 stm32f103rct6_64pin.48 4000.46,2844.46 4132,2976 ; C10.2 3950,3162.52 3950,3107.48 stm32f103rct6_64pin.64 4022.89,3085.11 4132,2976 ; C11.2 4441.87,2703.47 4368.57,2776.77 stm32f103rct6_64pin.32 4194.57,2789.83 4132,2852.41 4132,2976 ; v1(4565,3081) 4549.47,3065.47 C2.2 4449.27,3045.74 stm32f103rct6_64pin.19 4201.74,3045.74 4132,2976
  Top Layer w12: U101.2 4214,3713.83 4214,3503.15 D101.1
  Top Layer w20: U101.2 U101.4 4304,3993 4400,3993 C103.1@4457,3936 ; D101.1 4354.85,3495 C104.2 4388.15,3473.7 R5.1 4404.15,3389 v1(4464,3389) 4643.15,3389 R3.2 ; D103.2 4458.15,3836.15 C103.1 ; D103.2@4447,3793.58 D103.2@4457,3803.58
  Top Layer w25: v1(1813,3081) 1914,3182 v1(1914,3389)
  Bottom Layer w10: v1(1813,3081) 1828.53,3065.47 C2_1.2 1928.73,3045.74 stm32f103rct6_64pin_1.19 2176.26,3045.74 2246,2976 ; C11_1.2 1936.13,2703.47 2009.43,2776.77 stm32f103rct6_64pin_1.32 2183.43,2789.83 2246,2852.41 2246,2976 ; C10_1.2 2428,3162.52 2428,3107.48 stm32f103rct6_64pin_1.64 2355.11,3085.11 2246,2976 ; C9_1.2 2477.52,2759 2419.54,2759 stm32f103rct6_64pin_1.48 2377.54,2844.46 2246,2976
  Bottom Layer w12: D101_1.1 2164,3503.15 2164,3713.83 U101_1.2
  Bottom Layer w20: R3_1.2 1734.85,3389 v1(1914,3389) 1973.85,3389 R5_1.1 1989.85,3473.7 C104_1.2 2023.15,3495 D101_1.1 ; C103_1.1 1919.85,3836.15 D103_1.2 ; D103_1.2@1921,3803.58 D103_1.2@1931,3793.58 ; C103_1.1@1921,3936 1978,3993 2074,3993 U101_1.4 U101_1.2
  Bottom Layer w25: v1(4464,3389) 4464,3182 v1(4565,3081)
"VCC 5V": C101.1 C101_1.1 C102.2 C102_1.2 D102.2 D102_1.2 SW101.1 SW101_1.1 U101.3 U101_1.3 | length 1206.5
  Top Layer w20: SW101.1 4056,3947.85 C101.1 4032.15,3854.73 D102.2 4040.09,3797.58 U101.3 4117.84,3640.01 C102.2
  Bottom Layer w20: C102_1.2 2260.16,3640.01 U101_1.3 2337.91,3797.58 D102_1.2 2345.85,3854.73 C101_1.1 2322,3947.85 SW101_1.1
"VCC IN": Designator140.1 Designator140_1.1 ST_LIINK.1 ST_LIINK_1.1 SW101.2 SW101.3 SW101_1.2 SW101_1.3 | length 2177.1
  Top Layer w15: Designator140.1 3616.82,4054.82 3679,4117 4092,4117 SW101.3 SW101.2 4528,4053 ST_LIINK.1 ; SW101.2@4272,4073 SW101.2@4275,4070
  Bottom Layer w15: ST_LIINK_1.1 1850,4053 SW101_1.2 SW101_1.3 2286,4117 2699,4117 2761.18,4054.82 Designator140_1.1 ; SW101_1.2@2103,4070 SW101_1.2@2106,4073
pads on no net: Designator140. Designator140.2 Designator140.3 Designator140.4 Designator140.6 Designator140_1. Designator140_1.2 Designator140_1.3 Designator140_1.4 Designator140_1.6
copper on no net: | length 2065
  Bottom Layer w60: 3189,2293 3189,4358
  other v1: 3189,4147

## Polygon pours and split planes (outlines as drawn)
GND on Top Layer "Top Layer-No Net" (solid, remove dead copper, pour order 7): 4659,4144 3403,4144 ccw(c3403,4044) 3303,4044 3303,3673 3303,2484 ccw(c3403,2484) 3403,2384 3910,2384 4891,2384 ccw(c4891,2484) 4991,2484 4991,3062 4991,4044 ccw(c4891,4044) 4891,4144 4658,4144
GND on Top Layer "Top Layer-No Net" (solid, remove dead copper, pour order 6): 1719,4144 2975,4144 cw(c2975,4044) 3075,4044 3075,3673 3075,2484 cw(c2975,2484) 2975,2384 2468,2384 1487,2384 cw(c1487,2484) 1387,2484 1387,3062 1387,4044 cw(c1487,4044) 1487,4144 1720,4144
GND on Bottom Layer "Top Layer-No Net" (solid, remove dead copper, pour order 5): 4659,4144 3403,4144 ccw(c3403,4044) 3303,4044 3303,3673 3303,2484 ccw(c3403,2484) 3403,2384 3910,2384 4891,2384 ccw(c4891,2484) 4991,2484 4991,3062 4991,4044 ccw(c4891,4044) 4891,4144 4658,4144
GND on Bottom Layer "Top Layer-No Net" (solid, remove dead copper, pour order 4): 1719,4144 2975,4144 cw(c2975,4044) 3075,4044 3075,3673 3075,2484 cw(c2975,2484) 2975,2384 2468,2384 1487,2384 cw(c1487,2484) 1387,2484 1387,3062 1387,4044 cw(c1487,4044) 1487,4144 1720,4144

## Other copper
Top Layer:
  text "PC2" at 2704,3717 h60
  text "PC3" at 3024,3705 h60
  text "PC0" at 2702,3633 h60
  text "PC1" at 3020,3610 h60
  text "RST" at 3031,3510 h60
  text "PD1" at 2699,3489 h60
  text "C15" at 2701,3411 h60
  text "PD0" at 3029,3408 h60
  text "C13" at 2702,3312 h60
  text "C14" at 3021,3310 h60
  text "A1" at 1797,3220 h60
  text "PB9" at 2703,3211 h60
  text "VBAT" at 3048,3209 h50
  text "PA0" at 1510,3206 h60
  text "A3" at 1801,3133 h60
  text "PA2" at 1512,3112 h60
  text "PB7" at 2700,3109 h60
  text "PB8" at 3022,3109 h60
  text "PA4" at 1512,3015 h60
  text "PB5" at 2703,3011 h60
  text "PB6" at 3024,3008 h60
  text "A5" at 1802,2994 h60
  text "PA6" at 1513,2912 h60
  text "PB4" at 3028,2912 h60
  text "A7" at 1804,2910 h60
  text "PB3" at 2700,2908 h60
  text "PC4" at 1512,2814 h60
  text "C5" at 1796,2814 h60
  text "PD2" at 3022,2814 h60
  text "C12" at 2702,2811 h60
  text "B1" at 1798,2722 h60
  text "C10" at 2703,2715 h60
  text "C11" at 3016,2713 h60
  text "PB0" at 1512,2711 h60
  text "B10" at 1509,2613 h60
  text "A15" at 3026,2611 h60
  text "B11" at 1823,2604 h60
  text "JTCK" at 2703,2591 h55
  text "JTMS" at 2993,2419 h50
  text "B12" at 1572,2414 h60
  text "B13" at 1684,2414 h60
  text "B14" at 1794,2414 h60
  text "B15" at 1909,2414 h60
  text "A8" at 2404,2414 h60
  text "A9" at 2503,2414 h60
  text "A10" at 2622,2414 h60
  text "A11" at 2737,2414 h60
  text "A12" at 2855,2414 h60
  text "C6" at 2004,2413.47 h60
  text "C7" at 2099,2413.47 h60
  text "C8" at 2200,2413.47 h60
  text "C9" at 2301,2413.47 h60
Bottom Layer:
  text "PC2" at 3674,3717 h60
  text "PC3" at 3354,3705 h60
  text "PC0" at 3676,3633 h60
  text "PC1" at 3358,3610 h60
  text "RST" at 3347,3510 h60
  text "PD1" at 3679,3489 h60
  text "C15" at 3677,3411 h60
  text "PD0" at 3349,3408 h60
  text "C13" at 3676,3312 h60
  text "C14" at 3357,3310 h60
  text "A1" at 4581,3220 h60
  text "PB9" at 3675,3211 h60
  text "VBAT" at 3330,3209 h50
  text "PA0" at 4868,3206 h60
  text "A3" at 4577,3133 h60
  text "PA2" at 4866,3112 h60
  text "PB8" at 3356,3109 h60
  text "PB7" at 3678,3109 h60
  text "PA4" at 4866,3015 h60
  text "PB5" at 3675,3011 h60
  text "PB6" at 3354,3008 h60
  text "A5" at 4576,2994 h60
  text "PB4" at 3350,2912 h60
  text "PA6" at 4865,2912 h60
  text "A7" at 4574,2910 h60
  text "PB3" at 3678,2908 h60
  text "PD2" at 3356,2814 h60
  text "C5" at 4582,2814 h60
  text "PC4" at 4866,2814 h60
  text "C12" at 3676,2811 h60
  text "B1" at 4580,2722 h60
  text "C10" at 3675,2715 h60
  text "C11" at 3362,2713 h60
  text "PB0" at 4866,2711 h60
  text "B10" at 4869,2613 h60
  text "A15" at 3352,2611 h60
  text "B11" at 4555,2604 h60
  text "JTCK" at 3675,2591 h55
  text "JTMS" at 3385,2419 h50
  text "A12" at 3523,2414 h60
  text "A11" at 3641,2414 h60
  text "A10" at 3756,2414 h60
  text "A9" at 3875,2414 h60
  text "A8" at 3974,2414 h60
  text "B15" at 4469,2414 h60
  text "B14" at 4584,2414 h60
  text "B13" at 4694,2414 h60
  text "B12" at 4806,2414 h60
  text "C9" at 4077,2413.47 h60
  text "C8" at 4178,2413.47 h60
  text "C7" at 4279,2413.47 h60
  text "C6" at 4374,2413.47 h60

## Text inside footprints (layer, text, board x,y; h text height)
Designator140: Top Overlay "+" at 3538.08,3929.48 h39.37 r180
Designator140_1: Bottom Overlay "+" at 2839.92,3929.48 h39.37 r180